# Altium PCB PCB1V1.2.PcbDoc (part 3 of 3)
Units mm, origin at the board's own origin, x right, y up, seen from the top; angles counter-clockwise.
Board outline 74.8 x 89.66 mm, 2 copper layers (Top Layer, Bottom Layer); 292 components, 184 nets, 916 pads, 196 vias.
Unrouted connection lines stored in the file: 106.
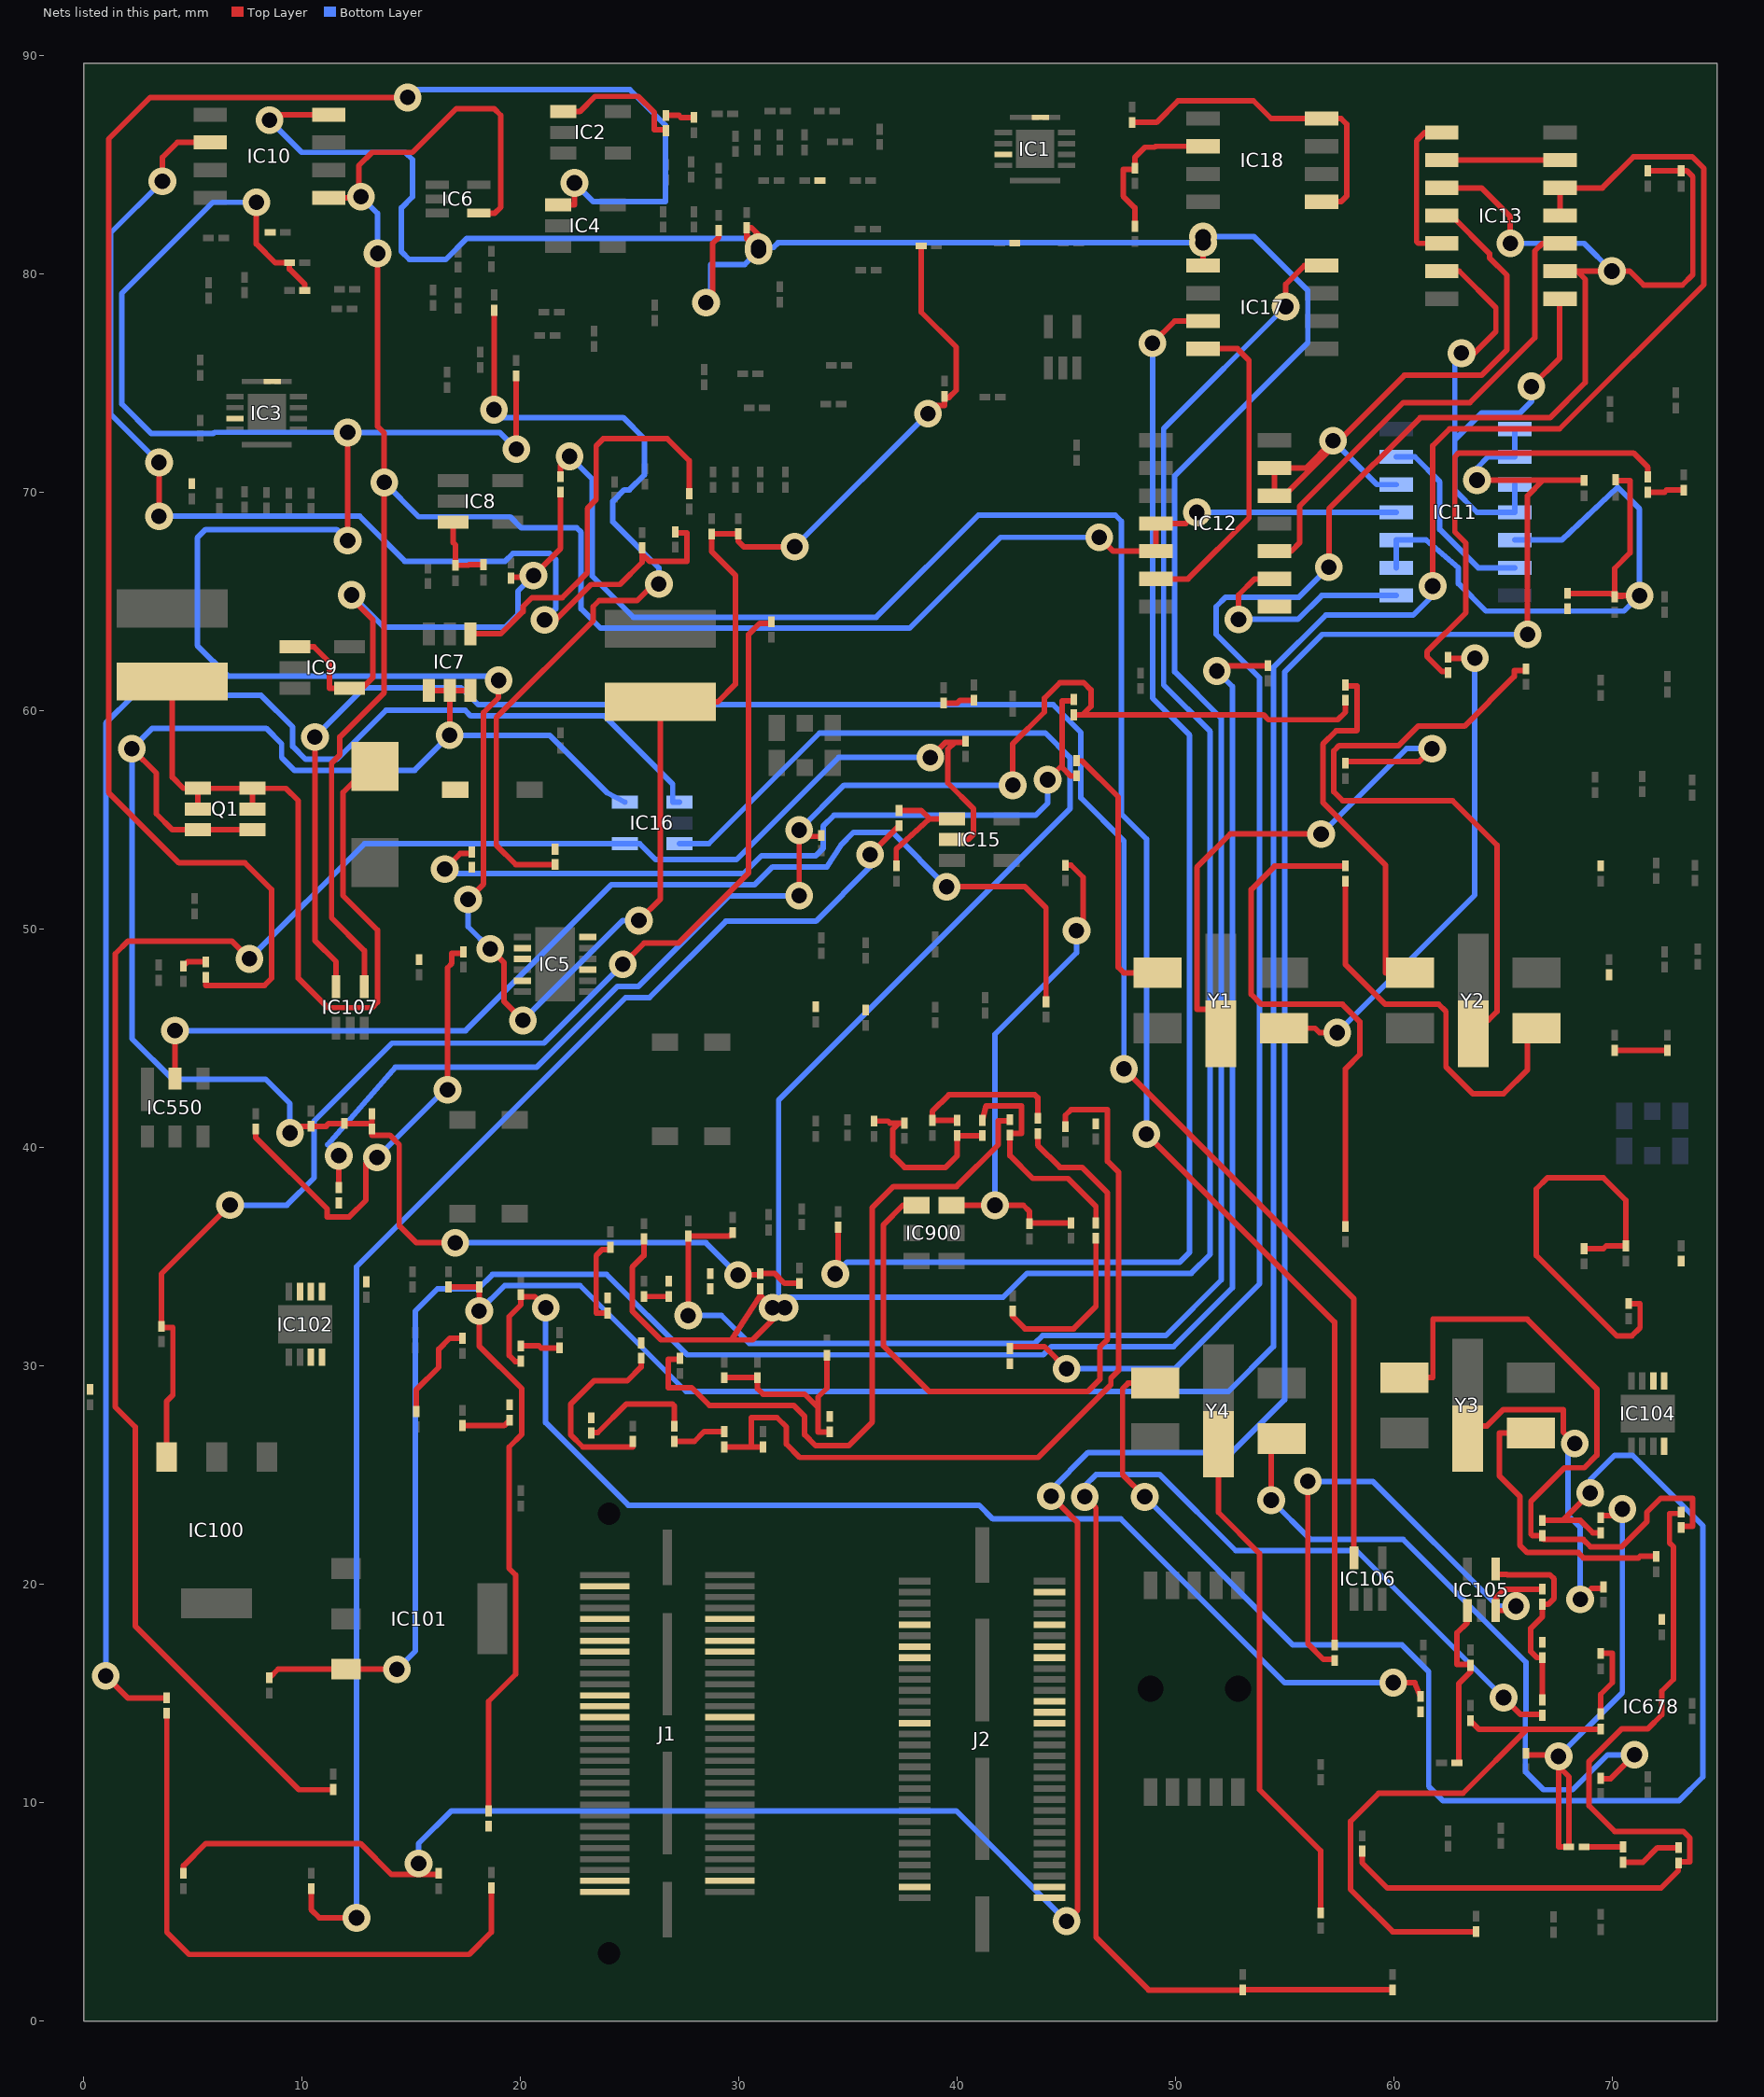
[diagram p3: the nets of this part, all layers, seen from the top]

## Via types
v1: diameter 1.27, hole 0.711, Top Layer to Bottom Layer, 196 vias

## Nets (pads, with @x,y where several pads share a name; then routed paths per layer and width w, separated by ;. In a path a pad name is that pad's centre, name@x,y a point inside that pad or via, vN(x,y) a via of type N, cw(c..) or ccw(c..) an arc to the next point about the centre after c; other vN are vias at no path point) (continued)
NetC54_2: C54.2 IC11.1 IC11.2 R29.2 R30.2 | length 141
  Top Layer w0.254: R30.2@4.576,6.762 4.576,7.112 5.592,8.128 12.675,8.128 14.097,6.706 v1@15.342,6.706 ; v1(15.342,7.214) v1@15.342,6.706 ; R29.2@16.26,6.762 16.26,6.706 v1@15.342,6.706 ; v1(44.298,24.028) 45.517,22.809 45.517,5.08 v1(45.009,4.572) ; v1(63.805,70.561) 66.832,70.561 ; v1(66.116,63.5) 66.116,69.845 66.832,70.561 ; C54.2@68.707,70.55 68.707,70.561 66.832,70.561
  Bottom Layer w0.254: v1(15.342,7.214) 15.342,8.128 16.84,9.627 39.954,9.627 v1(45.009,4.572) ; v1(44.298,24.028) 44.298,24.333 45.999,26.035 52.578,26.035 54.991,28.448 54.991,61.773 56.718,63.5 v1(66.116,63.5) ; v1(63.805,70.561) 63.805,71.12 64.313,71.628 IC11.2@65.532,71.628 IC11.1@65.532,72.898
NetC55_2: C55.2 IC11.5 IC11.9 IC11.10 R31.2 R32.2 | length 36.3
  Top Layer w0.254: R31.2@67.945,65.374 69.946,65.374 R32.2@70.104,65.216 ; C55.2@70.152,70.581 70.152,70.536 70.815,70.536 70.815,67.234 70.104,66.523 R32.2@70.104,65.278 ; R32.2@70.104,65.216 R32.2@70.104,65.278 ; R32.2@70.104,65.216 v1(71.247,65.278) R32.2@70.104,65.278
  Bottom Layer w0.254: IC11.9@60.108,66.548 IC11.10@60.108,67.818 61.468,67.818 62.954,66.548 62.954,65.824 64.211,64.567 70.536,64.567 v1(71.247,65.278) 71.247,69.24 70.246,70.241 67.681,67.818 IC11.5@65.532,67.818
NetC56_2: C56.2 IC13.2 IC13.10 R33.2 R34.2 | length 96.6
  Top Layer w0.254: R34.2@42.418,30.799 42.418,30.886 43.993,30.886 v1(45.009,29.87) ; v1(57.023,66.573) 57.023,69.24 61.204,73.421 67.147,73.421 68.758,75.032 68.758,79.756 68.377,80.137 ; IC13.10@62.185,83.947 64.008,83.947 65.329,82.626 v1(65.329,81.407) ; IC13.2@67.609,80.137 68.377,80.137 ; C56.2@71.628,84.726 R33.2@73.152,84.726 73.152,84.734 73.406,84.734 73.685,84.455 73.685,79.973 73.207,79.495 71.436,79.495 70.794,80.137 v1(69.977,80.137) 68.377,80.137
  Bottom Layer w0.254: v1(45.009,29.87) 49.962,29.87 53.848,33.757 53.848,61.513 51.861,63.5 51.861,64.77 52.292,65.202 55.651,65.202 v1(57.023,66.573) ; v1(65.329,81.407) 68.707,81.407 v1(69.977,80.137)
NetC57_1: C57.1 IC13.4 IC13.5 R35.2 R36.1 | length 142.9
  Top Layer w0.254: R36.1@16.716,33.615 C57.1@18.113,33.615 v1(18.113,32.512) 18.113,30.909 20.066,28.956 20.066,26.873 19.482,26.289 19.482,20.726 19.787,20.422 19.787,15.882 18.542,14.638 R35.2@18.542,9.621 ; v1(61.773,65.71) 61.773,72.136 62.55,72.913 67.589,72.913 74.193,79.518 74.193,84.836 73.66,85.369 70.968,85.369 69.545,83.947 IC13.5@67.609,83.947 IC13.4@67.609,82.677
  Bottom Layer w0.254: v1(18.113,32.512) 19.281,33.68 22.733,33.68 27.584,28.829 52.426,28.829 54.483,30.886 54.483,61.989 56.883,64.389 60.884,64.389 61.773,65.278 v1(61.773,65.71)
NetC58_2: C58.2 IC15.1 R37.2 | length 5.4
  Top Layer w0.254: C58.2@37.211,52.897 37.211,53.67 38.739,55.052 ; R37.2@37.338,55.437 38.354,55.437 38.739,55.052 ; IC15.1@39.771,55.052 38.739,55.052
NetC62_2: C62.2 IC16.1 R38.2 | length 78.5
  Top Layer w0.254: v1(1.016,15.799) 2.032,14.783 3.81,14.783 R38.2@3.81,14.797
  Bottom Layer w0.254: v1(1.016,15.799) 1.016,59.436 2.286,60.706 8.128,60.706 9.576,59.258 9.576,58.369 10.16,57.785 11.608,57.785 13.843,60.02 17.475,60.02 17.729,59.766 23.851,59.766 26.975,56.642 26.975,55.814 IC16.1@27.285,55.814
NetC65_1: C65.1 IC16.3 IC17.8 R39.1 | length 137.1
  Top Layer w0.254: C65.1@25.654,35.814 25.654,35.052 25.121,34.519 25.121,32.512 26.441,31.191 29.667,31.191 ; R39.1@30.988,33.528 30.988,33.223 ; v1(31.547,32.664) 30.988,33.223 ; v1(32.106,32.664) 30.632,31.191 29.667,31.191 ; v1(55.042,78.511) 55.042,79.527 55.905,80.391 IC17.8@56.687,80.391 ; 29.667,31.191 30.988,33.223
  Bottom Layer w0.254: IC16.3@27.285,53.914 28.628,53.914 33.693,58.979 44.044,58.979 45.161,57.861 45.161,55.515 31.826,42.18 v1@31.826,32.944 ; v1(31.547,32.664) v1@31.826,32.944 ; v1(32.106,32.664) v1@31.826,32.944 ; v1(55.042,78.511) 49.454,72.923 49.454,61.182 51.587,59.049 51.587,35.114 50.718,34.244 43.201,34.244 42.104,33.147 32.029,33.147 v1@31.826,32.944
NetC68_1: C68.1 IC18.5 IC18.8 | length 15.2
  Top Layer w0.254: C68.1@48.006,86.947 49.126,86.947 50.114,87.935 53.569,87.935 54.381,87.122 IC18.8@56.687,87.122 57.582,87.122 57.836,86.868 57.836,83.566 57.582,83.312 IC18.5@56.687,83.312
NetC100_1: C100.1 R101.2 | length 21
  Top Layer w0.254: C100.1@62.484,61.753 62.484,61.798 62.197,61.798 61.512,62.484 61.512,62.705 63.297,64.491 63.297,67.679 62.789,68.187 62.789,71.628 62.967,71.806 70.968,71.806 71.628,71.145 R101.2@71.628,70.708
NetC100_2: C100.2 Y1.3 | length 23.5
  Top Layer w0.254: Y1.3@54.97,45.465 56.388,45.465 56.59,45.263 v1(57.404,45.263) ; C100.2@62.484,62.453 62.484,62.408 v1(63.703,62.408)
  Bottom Layer w0.254: v1(57.404,45.263) 63.703,51.562 v1(63.703,62.408)
NetC105_2: C105.2 C106.2 IC100.3 | length 57.3
  Top Layer w0.254: IC100.3@3.796,25.829 3.796,28.372 4.089,28.665 4.089,31.75 3.556,31.75 C106.2@3.556,31.815 3.556,34.214 v1(6.706,37.363) ; v1(24.689,48.387) 25.662,49.36 27.237,49.36 30.455,52.578 30.455,63.5 30.963,64.008 31.496,64.008 C105.2@31.496,64.073
  Bottom Layer w0.254: v1(6.706,37.363) 9.305,37.363 10.55,38.608 10.55,41.208 14.122,44.78 21.082,44.78 v1(24.689,48.387)
NetC107_2: C107.2 C108.2 IC101.3 | length 94.7
  Top Layer w0.254: C108.2@8.509,15.717 8.907,16.115 IC101.3@12.017,16.115 14.34,16.115 v1(14.351,16.104) ; v1(51.892,61.824) 52.121,62.052 54.229,62.052 C107.2@54.229,62.072
  Bottom Layer w0.254: v1(14.351,16.104) 15.189,16.942 15.189,32.512 16.205,33.528 18.059,33.528 18.72,34.188 23.952,34.188 27.635,30.505 43.942,30.505 44.323,30.886 49.911,30.886 52.603,33.579 52.603,61.112 v1(51.892,61.824)
NetC110_2: C110.2 Y1.2 | length 26
  Top Layer w0.254: Y1.2@52.07,45.21 52.07,46.33 50.978,46.33 50.978,52.832 52.502,54.356 v1(56.667,54.356) ; C110.2@57.785,57.596 57.785,57.683 61.163,57.683 v1(61.747,58.268)
  Bottom Layer w0.254: v1(56.667,54.356) 60.579,58.268 v1(61.747,58.268)
NetC111_1: C111.1 Y2.3 | length 18.9
  Top Layer w0.254: C111.1@57.785,52.197 57.785,48.375 59.602,46.558 62.052,46.558 62.382,46.228 62.382,43.688 63.602,42.469 65.024,42.469 66.116,43.561 66.116,45.465 Y2.3@66.527,45.465
NetC111_2: C111.2 R106.2 | length 24.7
  Top Layer w0.254: R106.2@57.785,36.387 57.785,43.604 58.436,44.256 58.436,45.763 57.642,46.558 53.924,46.558 53.467,47.015 53.467,51.816 54.534,52.883 57.785,52.883 C111.2@57.785,52.897
NetC114_1: C114.1 C116.2 L105.2 | length 37.7
  Top Layer w0.254: v1(16.535,52.756) 17.247,53.467 17.78,53.467 L105.2@17.78,53.532 ; v1(44.145,56.845) 44.806,57.506 ; C116.2@45.339,60.517 45.339,60.452 44.806,60.452 44.806,57.506 ; C114.1@45.466,57.023 45.187,57.023 44.806,57.404 44.806,57.506
  Bottom Layer w0.254: v1(16.535,52.756) 16.744,52.547 30.226,52.547 31.044,53.365 33.528,53.365 33.858,53.695 33.858,54.712 34.366,55.22 43.594,55.22 44.145,55.771 v1(44.145,56.845)
NetC114_2: C114.2 Y1.6 | length 12.3
  Top Layer w0.254: C114.2@45.466,57.723 45.466,57.709 45.72,57.709 47.371,56.058 47.371,48.26 47.626,48.005 Y1.6@49.17,48.005
NetC115_1: C115.1 C116.1 L106.2 L107.2 | length 65
  Top Layer w0.254: L107.2@11.684,38.165 v1(11.684,39.624) ; v1(32.766,51.531) v1@32.766,54.28 ; v1(32.766,54.534) v1@32.766,54.28 ; L106.2@33.782,54.294 33.782,54.229 33.779,54.229 v1@32.766,54.28 ; v1(42.545,56.591) 42.545,58.496 43.993,59.944 43.993,60.579 44.704,61.29 45.796,61.29 46.126,60.96 46.126,60.198 45.745,59.817 ; C116.1@45.339,59.817 45.745,59.817 ; C115.1@57.785,60.483 57.785,59.944 57.429,59.588 54.254,59.588 54.026,59.817 45.745,59.817
  Bottom Layer w0.254: v1(11.684,39.624) 11.176,40.132 14.275,43.688 20.752,43.688 24.435,47.371 25.4,47.371 29.56,51.531 v1(32.766,51.531) ; v1(32.766,54.534) 34.823,56.591 v1(42.545,56.591)
NetC115_2: C115.2 Y2.6 | length 17.2
  Top Layer w0.254: C115.2@57.785,61.183 57.785,61.138 58.318,61.138 58.318,59.12 58.279,59.08 57.353,59.08 56.744,58.471 56.744,55.804 59.622,52.925 59.622,48.005 Y2.6@60.727,48.005
NetC117_2: C117.2 Y2.2 | length 30.4
  Top Layer w0.254: Y2.2@63.627,45.21 63.627,45.847 64.338,45.847 64.719,46.228 64.719,53.848 62.684,55.884 57.658,55.884 57.252,56.29 57.252,58.166 57.494,58.408 60.219,58.408 61.105,59.295 63.232,59.295 65.507,61.57 65.507,61.849 66.04,61.849 C117.2@66.04,61.914
NetC120_2: C120.2 IC102.7
NetC121_1: C121.1 R110.1 | length 2.4
  Top Layer w0.254: C121.1@70.104,44.45 R110.1@72.517,44.45
NetC123_2: C123.2 L109.2 R111.2 | length 19.9
  Top Layer w0.254: C123.2@68.707,35.371 69.596,35.371 69.723,35.498 L109.2@70.612,35.498 70.612,37.592 69.596,38.608 67.027,38.608 66.519,38.1 66.519,35.056 70.206,31.369 70.891,31.369 71.272,31.75 71.272,32.842 70.739,32.842 R111.2@70.739,32.862
NetC124_2: C124.2 IC678.7 IC678.8
NetC129_1: C129.1 C130.1 Y3.6 | length 32
  Top Layer w0.254: Y3.6@60.473,29.463 61.784,29.463 61.784,32.132 66.102,32.132 69.291,28.943 69.291,25.908 68.717,25.334 67.803,25.334 66.271,23.802 66.271,22.301 66.347,22.225 C130.1@66.802,22.225 66.802,22.098 66.853,22.047 68.67,22.047 68.996,21.721 70.437,21.721 71.576,22.86 71.576,23.294 72.219,23.937 73.683,23.937 73.683,22.657 73.152,22.657 C129.1@73.152,22.606
NetC129_2: C129.2 L108.1 L112.1 | length 39.4
  Top Layer w0.254: L108.1@58.547,7.778 58.547,7.239 59.693,6.093 72.234,6.093 73.025,6.883 L112.1@73.025,7.239 73.025,7.29 73.556,7.29 73.556,8.382 73.251,8.687 70.104,8.687 68.936,9.855 68.936,11.887 70.434,13.386 71.628,13.386 72.263,14.021 72.263,15.113 72.796,15.646 72.796,21.717 72.619,21.895 72.619,23.241 73.152,23.241 C129.2@73.152,23.306
NetC130_2: C130.2 C133.1 Y4.6 | length 65.6
  Top Layer w0.254: v1(48.59,24.003) 47.574,25.019 47.574,28.956 47.828,29.21 Y4.6@49.064,29.21 ; C130.2@66.802,22.925 67.731,22.925 ; v1(68.986,24.181) 67.731,22.925 ; C133.1@69.469,22.352 69.109,22.352 68.536,22.925 67.731,22.925
  Bottom Layer w0.254: v1(48.59,24.003) 55.374,17.219 60.373,17.219 61.591,16.001 61.591,10.743 62.25,10.084 73.05,10.084 74.143,11.176 74.143,22.682 70.917,25.908 70.104,25.908 68.986,24.79 v1(68.986,24.181)
NetC132_2: C132.2 Y3.2 | length 15.9
  Top Layer w0.254: Y3.2@63.373,26.668 63.373,27.254 64.262,27.254 65.012,28.004 67.754,28.004 67.754,26.963 v1(68.275,26.441) ; v1(68.529,19.304) 69.037,19.812 69.596,19.812 C132.2@69.596,19.877
  Bottom Layer w0.254: v1(68.275,26.441) 67.97,26.137 67.97,23.165 68.529,22.606 v1(68.529,19.304)
NetC133_2: C133.2 L114.1 L115.2 | length 24
  Top Layer w0.254: L115.2@66.04,12.257 66.04,12.192 67.005,12.192 v1@67.539,11.659 ; v1(67.539,12.116) v1@67.539,11.659 ; C133.2@69.469,23.052 69.469,23.139 70.155,23.139 v1(70.46,23.444) ; v1@67.539,11.659 68.021,11.176 68.021,7.97 L114.1@68.007,7.97 67.539,7.97 v1@67.539,11.659
  Bottom Layer w0.254: v1(67.539,12.116) 70.46,15.037 v1(70.46,23.444)
NetC135_1: C135.1 IC678.4 R117.1 R121.1 | length 61.2
  Top Layer w0.254: v1(45.847,24.003) 46.355,23.495 46.355,3.835 48.768,1.422 53.082,1.422 R117.1@53.082,1.428 C135.1@59.94,1.428 ; v1(65.024,14.808) 65.786,14.046 66.802,14.046 R121.1@66.802,14.001
  Bottom Layer w0.254: v1(45.847,24.003) 45.847,24.511 46.355,25.019 49.276,25.019 52.756,21.539 58.293,21.539 v1(65.024,14.808)
NetC136_2: C136.2 Y4.2 | length 23.4
  Top Layer w0.254: Y4.2@51.964,26.415 51.964,23.292 53.848,21.408 53.848,10.592 56.642,7.798 C136.2@56.642,4.953
NetC137_1: C137.1 L116.1 R119.1 | length 25.6
  Top Layer w0.254: C137.1@63.5,13.747 63.881,13.366 66.096,13.366 ; R119.1@63.754,4.095 63.754,4.089 59.944,4.089 58.014,6.02 58.014,9.144 59.3,10.431 63.161,10.431 66.096,13.366 ; L116.1@69.469,13.366 66.096,13.366
NetC200_1: C200.1 IC900.4 | length 31.8
  Top Layer w0.254: IC900.4@38.14,37.355 37.516,37.355 36.627,36.466 36.627,30.912 38.706,28.833 45.986,28.833 46.533,29.379 46.533,30.861 46.888,31.217 46.888,37.922 45.72,39.091 44.704,39.091 43.688,40.107 C200.1@43.688,40.64
NetC200_2: C200.2 R200.2 R201.2 | length 7.7
  Top Layer w0.254: R200.2@40.005,41.244 R201.2@38.862,41.244 38.862,41.656 39.62,42.414 43.557,42.414 43.688,42.283 C200.2@43.688,41.34
NetC201_2: C201.2 L200.1 R200.1 R202.1 | length 8.5
  Top Layer w0.254: C201.2@36.195,41.213 36.83,41.213 36.926,41.117 37.338,41.117 ; R202.1@37.592,41.117 37.338,41.117 ; L200.1@41.148,40.544 R200.1@40.005,40.544 40.005,39.624 39.472,39.091 37.592,39.091 37.059,39.624 37.059,40.838 37.338,41.117
NetC202_1: C202.1 C203.1 | length 7.8
  Top Layer w0.254: C203.1@42.545,32.512 42.545,32.258 43.104,31.699 45.333,31.699 46.355,32.722 C202.1@46.355,35.845
NetC202_2: C202.2 L200.2 L201.1 | length 10.8
  Top Layer w0.254: L200.2@41.148,41.244 41.322,41.906 42.951,41.906 42.951,40.64 42.418,40.64 L201.1@42.418,40.575 42.418,39.624 43.459,38.583 45.076,38.583 46.355,37.303 C202.2@46.355,36.545
NetC204_2: C204.2 L201.2 | length 31.7
  Top Layer w0.254: C204.2@27.305,30.348 27.305,30.302 26.772,30.302 26.772,29.007 27.838,29.007 28.651,28.194 32.512,28.194 33.02,27.686 33.02,26.848 33.525,26.343 35.03,26.343 36.119,27.432 36.119,37.252 37.084,38.217 39.97,38.217 41.885,40.132 41.885,41.224 42.418,41.224 L201.2@42.418,41.275
NetC205_1: C205.1 C206.1 L202.1 R207.1 | length 9.4
  Top Layer w0.254: C205.1@29.337,29.464 C206.1@30.861,29.464 30.861,28.956 31.115,28.702 33.02,28.702 33.63,28.092 ; L202.1@34.036,30.48 34.036,28.981 33.63,28.575 33.63,28.092 ; R207.1@34.163,26.986 34.163,26.975 33.63,26.975 33.63,28.092
NetC207_1: C207.1 R213.1 | length 9.1
  Top Layer w0.254: C207.1@25.146,26.543 25.146,26.289 22.86,26.289 22.301,26.848 22.301,28.245 23.368,29.312 24.892,29.312 25.527,29.947 R213.1@25.527,30.353
NetC208_1: C208.1 R215.1 | length 2.3
  Top Layer w0.254: C208.1@17.351,27.265 19.256,27.265 R215.1@19.51,27.519
NetC209_1: C209.1 R216.1 | length 4.1
  Top Layer w0.254: R216.1@24.003,32.416 24.003,32.41 23.47,32.41 23.47,35.052 23.749,35.331 24.13,35.331 C209.1@24.13,35.433
NetC210_1: C210.1 R217.1 | length 1.1
  Top Layer w0.254: C210.1@25.654,33.178 R217.1@26.797,33.178
NetC212_1: C212.1
NetC650_1: C650.1 R653.1 | length 39.5
  Top Layer w0.254: v1(18.796,73.787) R653.1@18.796,78.342 ; C650.1@21.59,52.959 19.787,52.959 18.898,53.848 18.898,59.69 23.33,64.123 23.33,64.77 23.61,65.049 25.349,65.049 26.111,65.811 v1(26.34,65.811)
  Bottom Layer w0.254: v1(18.796,73.787) 19.152,73.431 24.704,73.431 25.679,72.456 25.679,70.801 24.995,70.116 24.755,70.116 24.234,69.596 24.234,68.651 26.34,66.545 v1(26.34,65.811)
NetC650_2: C650.2 IC5.12
NetC651_2: C651.2 IC5.9
NetD6_2: D6.2 L18.1 Q1.1 Q1.2 Q1.5 Q1.6 | length 37.1
  Top Layer w0.254: L18.1@4.064,61.341 4.064,56.957 4.572,56.449 Q1.1@5.227,56.449 ; Q1.2@5.227,55.499 Q1.1@5.227,56.449 ; Q1.5@7.727,55.499 Q1.6@7.727,56.449 ; D6.2@13.335,57.445 13.062,57.445 11.879,56.262 11.879,51.539 13.462,49.956 13.462,46.66 13.208,46.406 11.176,46.406 9.83,47.752 9.83,55.88 9.261,56.449 Q1.6@7.727,56.449 ; Q1.1@5.227,56.449 Q1.6@7.727,56.449
NetD?_1: D?.1 IC5.2
NetIC1_3: IC1.3 L2.2
NetIC1_14: IC1.14 L1.2
NetIC2_1: IC2.1 R11.1 | length 6.1
  Top Layer w0.254: IC2.1@21.971,87.437 22.718,87.437 23.419,88.138 25.4,88.138 26.137,87.401 26.137,86.614 26.67,86.614 R11.1@26.67,86.566
NetIC3_3: IC3.3 L13.2
NetIC3_14: IC3.14 L8.2
NetIC4_1: IC4.1 R16.1 | length 83.7
  Top Layer w0.254: R16.1@5.588,47.8 5.588,47.422 8.28,47.422 8.611,47.752 8.611,51.816 7.391,53.035 4.369,53.035 1.143,56.261 1.143,86.182 3.048,88.087 v1(14.834,88.087) ; IC4.1@21.737,83.167 22.479,83.167 v1(22.479,84.176)
  Bottom Layer w0.254: v1(14.834,88.087) 15.189,88.443 25.019,88.443 26.645,86.817 26.645,83.312 23.343,83.312 v1(22.479,84.176)
NetIC5_3: IC5.3 R17.2 R19.1 | length 21.2
  Top Layer w0.254: R19.1@7.878,40.846 7.878,40.462 11.151,37.19 11.151,36.83 12.167,36.83 12.929,37.592 12.929,39.268 13.208,39.548 v1(13.437,39.548) ; v1(16.662,42.647) 16.662,48.235 16.866,48.438 16.866,48.895 17.399,48.895 R17.2@17.399,48.96
  Bottom Layer w0.254: v1(13.437,39.548) 16.535,42.647 v1(16.662,42.647)
NetIC7_1: IC7.1 R26.2 | length 18.9
  Top Layer w0.254: IC7.1@17.714,63.53 17.714,63.525 19.101,63.525 20.119,64.543 20.119,64.77 20.525,65.176 21.913,65.176 23.063,66.327 23.063,69.266 23.471,69.673 23.471,72.136 23.791,72.456 26.731,72.456 27.734,71.453 R26.2@27.734,69.94
NetIC8_3: IC8.3 R20.2 R24.2 | length 3.3
  Top Layer w0.254: IC8.3@16.924,68.646 16.924,67.696 17.031,67.589 R24.2@17.031,66.661 17.628,66.661 17.659,66.692 R20.2@18.301,66.692
NetIC9_1: IC9.1 IC9.4 R21.1 R22.1 | length 25.5
  Top Layer w0.254: IC9.1@9.672,62.926 10.55,62.926 11.261,62.215 11.261,61.026 IC9.4@12.172,61.026 12.745,61.026 13.253,61.534 13.253,64.166 12.192,65.227 v1(12.268,65.303) ; R22.1@19.571,66.071 19.571,66.116 20.523,66.116 v1(20.599,66.192) 21.844,67.437 R21.1@21.844,70.019
  Bottom Layer w0.254: v1(12.268,65.303) 13.741,63.83 19.304,63.83 19.888,64.414 19.888,65.481 v1(20.599,66.192)
NetIC10_2: IC10.2 R25.1 R28.2 | length 53.4
  Top Layer w0.254: v1(3.454,68.91) v1(3.454,71.374) ; v1(3.607,84.252) 3.607,85.344 4.29,86.027 IC10.2@5.797,86.027 ; v1(21.107,64.16) 21.615,64.16 23.241,65.786 24.562,65.786 25.575,66.799 25.575,67.186 ; R25.1@25.575,67.462 25.575,67.186 ; R28.2@27.099,68.193 27.099,68.148 27.635,68.148 27.635,66.853 25.908,66.853 25.575,67.186
  Bottom Layer w0.254: v1(3.454,68.91) 12.649,68.91 14.707,66.853 19.304,66.853 19.66,67.208 21.336,67.208 21.615,66.929 21.615,64.668 v1(21.107,64.16) ; v1(3.454,71.374) 1.239,73.589 1.239,81.884 v1(3.607,84.252)
NetIC11_3: IC11.3 IC11.4 IC13.1 IC13.13 | length 26.6
  Top Layer w0.254: IC13.13@62.185,80.137 62.992,80.137 64.668,78.461 64.668,77.36 63.686,76.378 v1(63.094,76.378) ; v1(66.294,74.854) 67.589,76.149 67.589,78.867 IC13.1@67.609,78.867
  Bottom Layer w0.254: v1(63.094,76.378) 62.789,76.073 62.789,72.415 ; IC11.3@65.532,70.358 IC11.4@65.532,69.088 63.805,69.088 62.789,70.104 62.789,72.415 ; v1(66.294,74.854) 66.294,74.168 65.761,73.635 64.008,73.635 62.789,72.415
NetIC11_6: IC11.6 IC11.13 | length 8.8
  Bottom Layer w0.254: IC11.13@60.108,71.628 60.96,71.628 62.103,70.485 62.103,68.301 63.856,66.548 IC11.6@65.532,66.548
NetIC11_8: IC11.8 IC12.2 | length 10.7
  Top Layer w0.254: v1(52.883,64.186) 52.883,65.303 53.619,66.04 IC12.2@54.528,66.04
  Bottom Layer w0.254: v1(52.883,64.186) 55.601,64.186 56.693,65.278 IC11.8@60.108,65.278
NetIC11_12: IC11.12 IC12.5 IC12.6 IC13.11 | length 29.3
  Top Layer w0.254: v1(57.212,72.365) 55.967,71.12 IC12.6@54.528,71.12 IC12.5@54.528,69.85 54.966,69.85 60.477,75.362 64.008,75.362 65.176,76.53 65.176,79.94 64.376,80.741 64.376,80.937 62.636,82.677 IC13.11@62.185,82.677
  Bottom Layer w0.254: v1(57.212,72.365) 59.218,70.358 IC11.12@60.108,70.358
NetIC12_3: IC12.3 IC13.3 | length 22.2
  Top Layer w0.254: IC12.3@54.528,67.31 55.296,67.31 55.677,67.691 55.677,69.367 60.427,74.117 63.482,74.117 66.446,77.082 66.446,81.051 66.802,81.407 IC13.3@67.609,81.407
NetIC13_6: IC13.6 IC13.9 | length 5.4
  Top Layer w0.254: IC13.9@62.185,85.217 IC13.6@67.609,85.217
NetIC13_8: IC13.8 IC13.12 | length 7.1
  Top Layer w0.254: IC13.12@62.185,81.407 61.112,81.407 61.036,81.483 61.036,86.106 61.417,86.487 IC13.8@62.185,86.487
NetIC17_3: IC17.3 R40.1 | length 63.9
  Top Layer w0.254: v1(34.417,34.214) 34.544,34.341 R40.1@34.544,36.353 ; v1(48.946,76.835) 49.962,77.851 IC17.3@51.263,77.851
  Bottom Layer w0.254: v1(34.417,34.214) 34.956,34.752 50.199,34.752 50.648,35.201 50.648,58.88 48.946,60.582 v1(48.946,76.835)
NetIC18_2: IC18.2 R41.2 R42.2 | length 7.3
  Top Layer w0.254: R41.2@48.133,82.186 48.133,83.033 47.6,83.566 47.6,84.785 48.133,84.785 R42.2@48.133,84.853 48.133,85.344 48.597,85.808 49.045,85.808 49.089,85.852 IC18.2@51.263,85.852
NetIC102_3: IC102.3 L100.2
NetIC102_4: IC102.4 L102.2
NetIC102_5: IC102.5 L107.1
NetIC102_6: IC102.6 L105.1
NetIC104_4: IC104.4 L116.2 R114.2 | length 3.5
  Top Layer w0.254: L116.2@69.469,14.066 69.469,14.961 70.002,15.494 70.002,16.84 69.469,16.84 R114.2@69.469,16.829
NetIC104_5: IC104.5 L113.2
NetIC104_6: IC104.6 L110.1
NetIC105_1: IC105.1 R120.2 R123.1 | length 8.1
  Top Layer w0.254: R120.2@62.882,11.828 62.967,11.828 62.967,15.443 63.5,15.977 R123.1@63.5,16.287 63.5,16.332 62.89,16.332 62.89,17.78 63.358,18.248 IC105.1@63.358,18.796
NetIC105_3: IC105.3 R122.1 R124.2 | length 24.8
  Top Layer w0.254: v1(56.058,24.714) 56.058,17.272 56.769,16.561 57.277,16.561 R122.1@57.277,16.51 ; v1(65.583,18.999) 65.38,18.796 IC105.3@64.658,18.796 64.658,19.37 65.064,19.776 66.802,19.776 R124.2@66.802,19.781
  Bottom Layer w0.254: v1(56.058,24.714) 59.033,24.714 64.748,18.999 v1(65.583,18.999)
NetIC105_4: IC105.4 R121.2 R124.1 R125.1 | length 9.5
  Top Layer w0.254: IC105.4@64.658,20.696 64.658,20.455 65.178,20.455 65.2,20.433 67.146,20.433 67.335,20.244 67.335,19.355 67.056,19.075 R124.1@66.802,19.075 ; R121.2@66.802,14.701 R125.1@66.802,16.637 66.548,16.637 66.269,16.916 66.269,17.983 66.802,18.517 R124.1@66.802,19.075 ; R124.1@66.802,19.081 R124.1@66.802,19.075
NetIC106_5: IC106.5 IC107.5 | length 91.7
  Top Layer w0.254: v1(10.592,58.801) 10.592,49.479 11.557,48.514 IC107.5@11.557,47.366 ; v1(47.638,43.599) 58.166,33.071 IC106.5@58.166,21.204
  Bottom Layer w0.254: v1(10.592,58.801) 12.852,61.062 17.287,61.062 18.074,60.274 44.399,60.274 45.669,59.004 45.669,56.007 47.638,54.038 v1(47.638,43.599)
NetIC200_1: R219.2 R220.1 | length 1.8
  Top Layer w0.254: R219.2@20.018,30.917 20.853,30.917 20.949,30.821 R220.1@21.796,30.821
NetIC200_2: R222.2 R223.2 | length 4.6
  Top Layer w0.254: R222.2@15.24,27.909 15.24,28.92 16.263,29.943 16.263,30.766 16.764,31.267 R223.2@17.351,31.267
NetIC200_4: R214.1
NetIC200_5: R209.2 R210.1 | length 5.3
  Top Layer w0.254: R210.1@23.241,26.924 23.241,26.951 23.547,26.951 24.857,28.26 26.959,28.26 27.051,28.169 R209.2@27.051,27.243
NetIC200_7: R206.2
NetIC200_8: R209.1 R211.2 | length 2.5
  Top Layer w0.254: R209.1@27.051,26.543 27.965,26.543 28.411,26.989 R211.2@29.337,26.989
NetIC201_1: R207.2
NetIC201_8: R210.2
NetIC201_9: R214.2
NetIC201_10: 
NetIC203_5: 
NetIC550_2: IC550.2 L111.2 | length 51.7
  Top Layer w0.254: IC550.2@4.182,43.163 v1(4.182,45.356) ; v1(39.522,51.943) 43.104,51.943 44.069,50.978 L111.2@44.069,46.674
  Bottom Layer w0.254: v1(4.182,45.356) 17.491,45.356 24.174,52.039 30.734,52.039 31.552,52.857 34.036,52.857 34.671,53.848 35.255,54.432 37.033,54.432 v1(39.522,51.943)
NetIC678_5: IC678.5 L112.2 R113.1 | length 2.8
  Top Layer w0.254: R113.1@70.485,7.27 71.399,7.27 72.068,7.939 L112.2@73.025,7.939
NetIC678_6: IC678.6 L114.2 R113.2 | length 1.8
  Top Layer w0.254: L114.2@68.707,7.97 R113.2@70.485,7.97
NetIC900_1: IC900.1 R203.1 R204.1 R205.2 | length 23.9
  Top Layer w0.254: IC900.1@39.74,37.355 v1(41.732,37.355) 43.036,37.355 43.307,37.084 R203.1@43.307,36.545 ; R203.1@43.307,36.514 R203.1@43.307,36.545 ; R205.2@44.958,52.928 44.958,52.934 45.212,52.934 45.771,52.375 45.771,50.241 v1(45.466,49.936) ; R204.1@45.212,36.545 R203.1@43.307,36.545
  Bottom Layer w0.254: v1(41.732,37.355) 41.732,45.187 45.466,48.92 v1(45.466,49.936)
NetL15_2: L15.2 R11.2 | length 1.3
  Top Layer w0.254: R11.2@26.67,87.266 27.254,87.266 27.35,87.17 L15.2@27.94,87.17
NetL17_1: L17.1 R16.2 | length 1.1
  Top Layer w0.254: L17.1@4.572,48.308 4.764,48.5 R16.2@5.588,48.5
NetR100_1: R100.1 R102.1 | length 1.4
  Top Layer w0.254: R102.1@39.37,60.356 40.005,60.356 40.132,60.483 R100.1@40.767,60.483
NetR101_1: R101.1 R103.1 | length 1.7
  Top Layer w0.254: R101.1@71.628,70.008 72.39,70.008 72.486,70.104 R103.1@73.279,70.104
NetR112_2: R112.2 Y3.3 | length 13.5
  Top Layer w0.254: Y3.3@66.273,26.923 64.821,26.923 64.821,24.968 65.761,24.028 65.761,21.793 66.105,21.449 68.433,21.449 68.673,21.209 71.196,21.209 71.272,21.285 72.009,21.285 R112.2@72.009,21.274
NetR115_2: R115.2 Y4.3 | length 31.1
  Top Layer w0.254: v1(54.381,23.851) 54.381,26.67 Y4.3@54.864,26.67 ; R115.2@69.469,11.114 69.469,11.1 69.926,11.1 v1(71.018,12.192)
  Bottom Layer w0.254: v1(54.381,23.851) 56.185,22.047 60.427,22.047 66.04,16.434 66.04,14.021 66.015,13.995 66.015,11.423 66.846,10.592 68.183,10.592 69.783,12.192 v1(71.018,12.192)
NetR208_2: R208.2 R211.1 R212.1 | length 37.7
  Top Layer w0.254: R211.1@29.337,26.289 30.582,26.289 ; R212.1@31.115,26.289 30.582,26.289 ; R208.2@44.958,40.959 44.958,41.478 45.212,41.732 46.888,41.732 46.888,39.37 47.396,38.862 47.396,29.794 47.041,29.439 47.041,29.138 43.709,25.806 32.791,25.806 32.182,26.416 32.182,27.203 31.75,27.635 30.582,27.635 30.582,26.289
NetR218_2: R218.2 R219.1 R221.2 | length 55.7
  Top Layer w0.254: R219.1@20.018,30.217 20.018,30.201 19.761,30.201 19.482,30.48 19.482,32.258 20.018,32.794 R221.2@20.018,33.172 ; R221.2@20.018,33.265 R221.2@20.018,33.172 ; v1(21.158,32.664) 20.65,33.172 R221.2@20.018,33.172 ; v1(59.969,15.494) 60.96,15.494 R218.2@61.214,14.859
  Bottom Layer w0.254: v1(21.158,32.664) 21.158,27.407 24.943,23.622 41.002,23.622 41.637,22.987 47.498,22.987 54.991,15.494 v1(59.969,15.494)
PAEn_N: IC12.13 IC17.4 | length 15
  Top Layer w0.254: IC12.13@49.104,66.04 50.571,66.04 53.365,68.834 53.365,76.048 52.832,76.581 IC17.4@51.263,76.581
PAEn_P: IC6.4 IC10.5 IC11.11 IC12.11 IC12.12 IC107.4 | length 109
  Top Layer w0.254: IC10.5@11.221,83.487 v1@12.265,83.487 ; v1(12.7,83.541) 12.646,83.487 v1@12.265,83.487 ; IC107.4@12.857,47.366 12.857,49.017 11.354,50.521 11.354,57.607 11.735,57.988 11.735,58.801 13.767,60.833 v1(13.767,70.46) 13.767,72.72 13.462,73.025 v1(13.462,80.95) ; IC6.4@18.095,82.789 18.832,82.789 19.101,83.058 19.101,87.274 18.796,87.579 17.069,87.579 15.062,85.573 13.208,85.573 12.598,84.963 12.598,83.82 v1@12.265,83.487 ; v1(46.507,67.945) 47.142,67.31 IC12.12@49.104,67.31 IC12.11@49.104,68.58 50.47,68.58 v1(50.978,69.088)
  Bottom Layer w0.254: v1(12.7,83.541) 13.462,82.779 v1(13.462,80.95) ; v1(13.767,70.46) 15.342,68.885 19.533,68.885 20.041,68.377 22.581,68.377 22.781,68.176 22.781,64.67 23.672,63.779 37.821,63.779 41.986,67.945 v1(46.507,67.945) ; v1(50.978,69.088) IC11.11@60.108,69.088
PB_ENABLE: J1.47 J2.47 R35.1
RX/TX_CNTL: J1.45 J2.45 R34.1
SENSOR_PWR: C60.1 C61.2 IC15.2 IC16.4 J1.51 J2.51 | length 93.5
  Top Layer w0.254: v1(7.595,48.641) 6.782,49.454 2.032,49.454 1.448,48.87 1.448,28.118 2.362,27.203 2.362,18.085 9.855,10.592 11.43,10.592 C60.1@11.43,10.603 ; v1(38.771,57.861) 39.456,58.547 39.878,58.547 ; IC15.2@39.771,54.102 40.498,54.102 40.752,54.356 40.752,55.514 39.573,56.693 39.573,58.242 39.878,58.547 ; C61.2@40.386,58.612 40.386,58.547 39.878,58.547
  Bottom Layer w0.254: v1(7.595,48.641) 12.868,53.914 IC16.4@24.785,53.914 25.461,53.914 26.193,53.182 29.89,53.182 34.568,57.861 v1(38.771,57.861)
SPI1_MISO: J1.3 J2.3 R213.2
SPI1_MOSI: J1.4 J2.4 R215.2
SPI1_SCLK: J1.2 J2.2 R216.2
SPI1_SS: J1.46 J2.46 R217.2
TLM: IC12.1
TLM_DATA: J1.38 J2.38 R218.1
TLM_ENABLE: J1.52 J2.52 R31.1
TX_PA_CURRENT: C52.1 J1.33 J2.33 R38.1 | length 27.8
  Top Layer w0.254: R38.1@3.81,14.097 3.81,4.064 4.826,3.048 17.653,3.048 18.669,4.064 C52.1@18.669,6.096
TX_PWR_FWD: J1.48 J2.48 R21.2 R122.2 | length 89.6
  Top Layer w0.254: R21.2@21.844,70.719 21.844,71.247 v1(22.25,71.653) ; v1(48.666,40.615) 57.277,32.004 R122.2@57.277,17.21
  Bottom Layer w0.254: v1(22.25,71.653) 23.289,70.615 23.289,66.17 25.171,64.287 36.297,64.287 40.97,68.961 47.244,68.961 47.523,68.682 47.523,55.27 48.666,54.127 v1(48.666,40.615)
TX_PWR_RFLT: IC5.5 J1.58 J2.58
TX_TEMP: C53.1 J1.34 J2.34 R37.1 | length 66.6
  Top Layer w0.254: C53.1@10.418,6.062 10.418,5.101 10.795,4.724 v1(12.497,4.724) ; v1(36.017,53.416) R37.1@37.338,54.737
  Bottom Layer w0.254: v1(12.497,4.724) 12.497,34.544 24.816,46.863 25.908,46.863 29.409,50.364 33.528,50.364 36.017,52.853 v1(36.017,53.416)
Vbatt: C48.1 C49.1 C63.1 C64.1 IC10.8 IC17.1 | length 151
  Top Layer w0.254: v1(8.509,87.046) 8.76,87.297 IC10.8@11.221,87.297 ; v1(27.686,32.309) C64.1@27.686,35.941 29.56,35.941 C63.1@29.718,36.099 ; v1(28.499,78.689) 28.804,78.994 28.804,81.407 29.083,81.686 C48.1@29.083,81.994 ; v1(30.912,81.077) 30.353,81.636 30.353,81.788 ; v1(51.257,81.712) v1(51.257,81.432) 51.257,80.391 IC17.1@51.263,80.391 ; 30.353,81.788 C49.1@30.353,82.121 30.579,82.121 30.912,81.788 v1(30.912,81.229) 30.353,81.788
  Bottom Layer w0.254: v1(8.509,87.046) 9.982,85.573 14.732,85.573 15.062,85.242 15.062,83.541 14.554,83.033 14.554,81.026 14.91,80.67 16.586,80.67 17.551,81.636 30.505,81.636 v1(30.912,81.229) 31.598,81.229 31.801,81.432 v1(51.257,81.432) ; v1(27.686,32.309) 29.21,32.309 30.48,31.039 43.561,31.039 43.917,31.394 49.555,31.394 52.095,33.934 52.095,59.652 49.962,61.786 49.962,70.764 56.058,76.86 56.058,79.248 53.594,81.712 v1(51.257,81.712) ; v1(28.499,78.689) 28.704,78.895 28.704,80.436 30.271,80.436 v1(30.912,81.077)
VccPA: C19.1 C40.1 C42.1 L7.2 L12.1 L19.2 R1.1 R8.1 | length 147.2
  Top Layer w0.254: v1(7.909,83.287) 7.909,81.382 8.773,80.518 R8.1@9.429,80.518 9.429,80.227 10.129,79.527 L7.2@10.129,79.248 ; v1(12.09,67.793) v1(12.09,72.746) ; v1(17.602,51.359) 18.313,52.07 18.313,59.919 18.999,60.604 v1(18.999,61.392) ; v1(18.618,49.098) 19.253,48.463 19.253,46.685 v1(20.117,45.822) ; v1(19.812,71.984) C19.1@19.812,75.342 ; v1(25.425,50.394) 26.416,51.384 L19.2@26.416,60.414 29.045,60.414 29.845,61.214 29.845,66.209 28.75,67.304 C42.1@28.75,68.097 29.337,68.097 29.343,68.103 C40.1@29.972,68.103 29.972,67.767 30.226,67.513 v1(32.563,67.513) ; R1.1@38.354,81.28 38.354,78.257 39.954,76.657 39.954,74.676 39.627,74.349 L12.1@39.418,74.349 ; v1(38.659,73.609) 39.04,73.99 39.418,73.99 L12.1@39.418,74.349 ; L12.1@39.418,74.397 L12.1@39.418,74.349
  Bottom Layer w0.254: v1(7.909,83.287) 5.918,83.287 1.747,79.116 1.747,74.052 3.104,72.695 5.938,72.695 5.994,72.751 19.045,72.751 19.05,72.746 ; v1(12.09,67.793) 11.582,68.301 5.588,68.301 5.207,67.92 5.207,62.992 6.604,61.595 18.796,61.595 v1(18.999,61.392) ; v1(12.09,72.746) 19.05,72.746 ; v1(17.602,51.359) 17.602,50.114 v1(18.618,49.098) ; v1(19.812,71.984) 19.05,72.746 ; v1(20.117,45.822) 24.689,50.394 v1(25.425,50.394) ; v1(32.563,67.513) v1(38.659,73.609)
VGA_CTRL: J1.36 J2.36 R125.2
VPA: C36.1 C37.1 C66.1 IC7.4 IC7.5 IC7.6 IC16.5 Q1.3 Q1.4 R18.1 R18.2 R39.2 | length 90.7
  Top Layer w0.254: v1(2.21,58.268) 3.327,57.15 3.327,55.286 4.064,54.549 Q1.3@5.227,54.549 Q1.4@7.727,54.549 ; v1(9.449,40.665) 9.756,40.973 C36.1@10.414,40.973 11.1,40.973 11.227,41.1 C37.1@11.938,41.1 13.208,41.1 ; R18.2@13.208,41.546 13.208,41.1 ; IC7.4@15.814,60.93 IC7.5@16.764,60.93 ; v1(16.764,58.88) IC7.5@16.764,60.93 ; v1(17.018,35.636) 15.24,35.636 14.453,36.424 14.453,40.132 14.021,40.564 13.208,40.564 R18.1@13.208,40.846 13.208,41.1 ; IC7.6@17.714,60.93 IC7.5@16.764,60.93 ; v1(29.972,34.163) 30.988,34.163 R39.2@30.988,34.228 31.648,34.228 32.094,33.782 C66.1@32.766,33.782
  Bottom Layer w0.254: v1(9.449,40.665) 9.449,42.012 8.331,43.129 4.064,43.129 2.21,44.983 v1(2.21,58.268) 3.143,59.201 8.357,59.201 9.068,58.49 9.068,57.861 9.652,57.277 15.161,57.277 v1(16.764,58.88) 21.336,58.88 23.967,56.249 IC16.5@24.785,55.814 ; v1(17.018,35.636) 28.499,35.636 v1(29.972,34.163)
pads on no net: C215.2 IC1.1 IC1.4 IC1.5 IC1.7 IC1.8 IC1.11 IC1.15 IC1.17 IC3.1 IC3.4 IC3.5 IC3.7 IC3.8 IC3.11 IC3.15 IC3.17 IC6.1 IC10.4 IC11.14 IC12.10 IC13.14 IC14.3 IC15.4 IC17.2 IC17.7 IC18.4 IC104.9 IC106.3 IC107.1 IC900.2 IC900.5 J1.1 J1.5 J1.6 J1.7 J1.8 J1.9 J1.10 J1.11 J1.12 J1.13 J1.14 J1.15 J1.16 J1.21 J1.23 J1.25 J1.26 J1.27 J1.28 J1.29 J1.30 J1.31 J1.32 J1.35 J1.39 J1.50 J1.54 J1.55 J1.56 J1.57 J1.59 J1.60 J1.MH1 J1.MH2 J1.MP1 J1.MP2 J1.MP3 J1.MP4 J2.1 J2.5 J2.6 J2.7 J2.8 J2.9 J2.10 J2.11 J2.12 J2.13 J2.14 J2.15 J2.16 J2.21 J2.23 J2.25 J2.26 J2.27 J2.28 J2.29 J2.30 J2.31 J2.32 J2.35 J2.39 J2.50 J2.54 J2.55 J2.56 J2.57 J2.59 J2.60 J2.61 J2.62 J2.63 J2.64 J?.6 J?.7 J?.8 J?.9 J?.10 J?.MH1 J?.MH2 R220.2 R222.1 Y1.5 Y2.5 Y3.5 Y4.5